# EAGLE board modem_tda (EAGLE 6.3)

Size 50 x 50 mm. Coordinates in mm from the lower left corner, seen from the top.
Outline: 0,48 0,2 arc90 2,0 48,0 arc90 50,2 50,48 arc90 48,50 2,50 arc90 0,48
Copper layers (1*16): Top 0.035mm / dielectric 1.5mm / Bottom 0.035mm
Design rules "default": minimum track width 10mil, minimum drill 24mil, track to track 8mil, track to pad 8mil, pad to pad 8mil, via to via 8mil, smd to smd 8mil, copper to edge 40mil, drill to drill 8mil, minimum pad ring 10mil, minimum via ring 8mil, stop-mask expansion 4mil, vias tented up to drill 0mil, thermal gap 10mil
Holes 3.2 mm at 3,3 47,3 47,47 3,47

## Footprints (pad centres in the part's own frame; a part is rotated, then mirrored left to right if it is on the bottom)
CAPC2012X145AN = smd 1.15 x 1.45: 1 -0.9,0; 2 0.9,0
XC10B6 = drill 1.016 octagon: 1 -5.08,0; 2 5.08,0
SHK20L = drill 1.321 pad 2.54 long: 1A -10.414,0; 1B -5.334,0; 2A 10.414,0; 2B 5.334,0
SO16W = smd 0.6 x 2.2: 1 -4.445,-4.6; 2 -3.175,-4.6; 3 -1.905,-4.6; 4 -0.635,-4.6; 5 0.635,-4.6; 6 1.905,-4.6; 7 3.175,-4.6; 8 4.445,-4.6; 9 4.445,4.6; 10 3.175,4.6; 11 1.905,4.6; 12 0.635,4.6; 13 -0.635,4.6; 14 -1.905,4.6; 15 -3.175,4.6; 16 -4.445,4.6
RESC2012X70N = smd 1.05 x 1.4: 1 -0.95,0; 2 0.95,0
0207/10 = drill 0.813 octagon: 1 -5.08,0; 2 5.08,0
HC49/S = drill 0.813: 1 -2.413,0; 2 2.413,0

## Placement (x,y rotation side)
C1  27pF  [CAPC2012X145AN]  34.29,19.05 0 top
C2  27pF  [CAPC2012X145AN]  8.89,24.13 0 top
C6  0.1uF  [CAPC2012X145AN]  31.75,10.16 0 top
C7  0.1uF  [CAPC2012X145AN]  40.64,11.43 0 top
C8  0.1uF  [CAPC2012X145AN]  38.1,20.32 0 top
C9  47nF  [XC10B6]  11.43,33.02 0 top
C10  2.2nF  [CAPC2012X145AN]  24.13,7.62 0 top
F1  0.1A  [SHK20L]  40.64,38.1 90 top
IC1  TDA5051  [SO16W]  27.94,34.29 0 top
R1  100  [RESC2012X70N]  11.43,11.43 0 top
R2  220K  [0207/10]  6.35,-3.81 0 top  (outside the outline)
R3  1M  [0207/10]  6.35,-8.89 0 top  (outside the outline)
R4  1K  [RESC2012X70N]  11.43,15.24 0 top
R5  10K  [RESC2012X70N]  43.18,19.05 0 top
R7  2.2M  [RESC2012X70N]  13.97,5.08 0 top
R8  4.7K  [RESC2012X70N]  33.02,3.81 0 top
X1  8MHz  [HC49/S]  19.05,15.24 0 top

## Library data of the parts
C1 C2 C6-C8 C10 = ipc-7351-capacitor
C9 R2 R3 = rcl
F1 = fuse; OC_FARNELL: unknown; OC_NEWARK: unknown
IC1 = nxp
R1 R4 R5 R7 R8 = ipc-7351-resistor
X1 = crystal; OC_FARNELL: 1667008; OC_NEWARK: unknown